# Altium PCB sensors_8.PcbDoc
Units mil, origin at the board's own origin, x right, y up, seen from the top; angles counter-clockwise.
Board outline 3225 x 690 mil, 2 copper layers (Top Layer, Bottom Layer); 33 components, 26 nets, 92 pads, 0 vias.
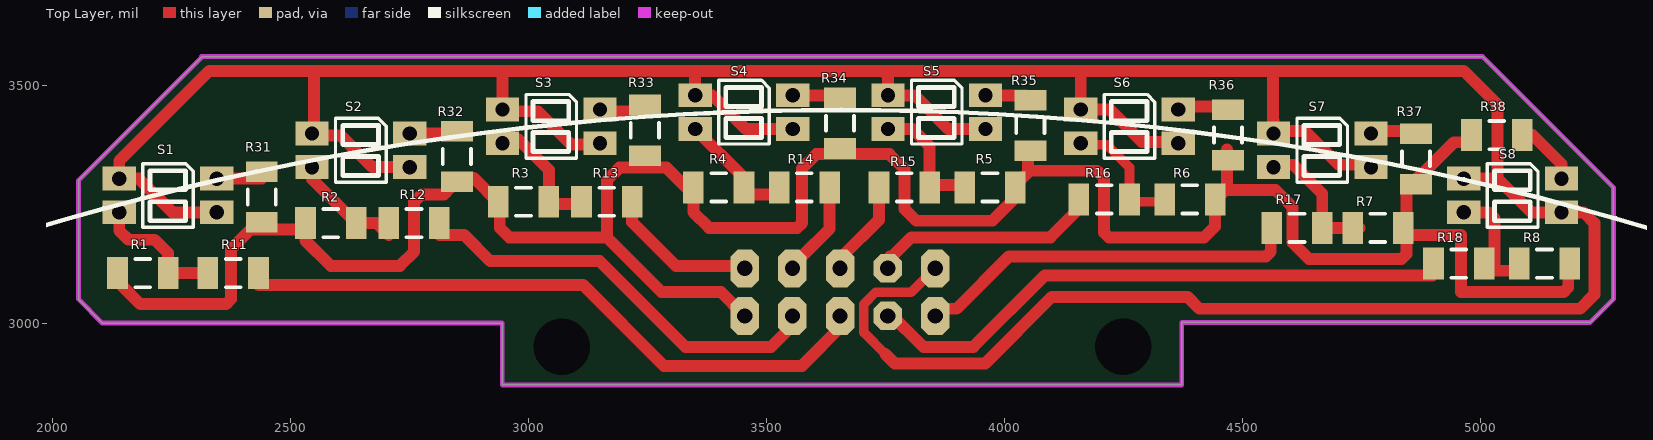
[diagram p0: Top Layer view]
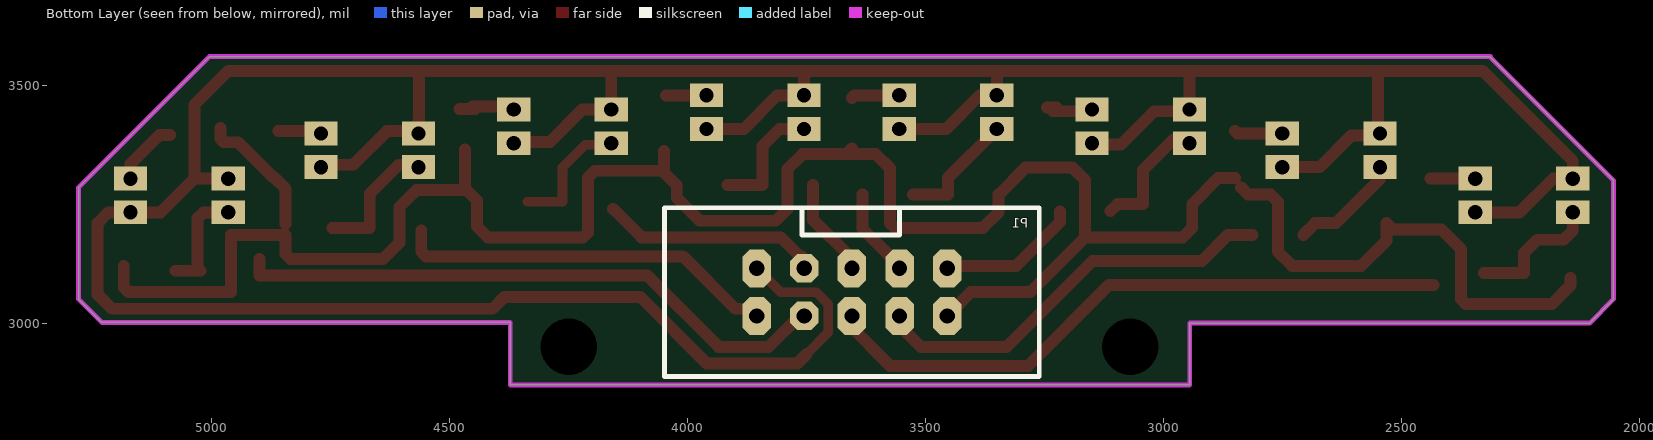
[diagram p1: Bottom Layer view, seen from below]

## Layer stack, top to bottom
Top Solder: solder mask 0.4, Solder Resist, Dk 3.5
Top Layer: signal copper 1.4
Dielectric1: dielectric 12.6, FR-4, Dk 4.8
Bottom Layer: signal copper 1.4
Bottom Solder: solder mask 0.4, Solder Resist, Dk 3.5

## Board outline
2055,3300 2313.75,3558.75 2315,3560 5005,3560 5275,3290 5280,3285 5280,3050 5231.25,3001.25 5230,3001.25 4372.8,3001.25 4372.8,2870 2945,2870 2945,3000 2105,3000 2055,3050 2055,3300

## Design rules (kind name [scope] priority, off if disabled: settings)
Clearance [All] p1: gap=10 ignorepadtopadclearanceinfootprint=FALSE except(0: Arc-Hole Track-Hole SMDPad-Hole THPad-Hole Via-Hole Fill-Hole Poly-Hole Region-Hole Text-Hole)
PolygonConnect [All] p1: connectstyle=Relief reliefconductorwidth=10 reliefentries=4 polygonreliefangle="90 Angle" airgapwidth=10
RoutingVias [All] p1: holewidth=28 width=50 viastyle="Through Hole" minholewidth=28 minwidth=50 maxholewidth=28 maxwidth=50
SolderMaskExpansion [All] p1: expansion=4 istentingtop=FALSE
Width [All] p1: maxlimit=30 minlimit=20 preferedwidth=25 bottomlayer_minwidth=25 minimp=50.000000 maximp=50.000000 favimp=50.000000
30 further rules are at their usual default settings.

## Components (designator, comment, footprint, x,y, rotation, side; value= is the part's Value field where it differs from the comment)
P1 "Header 5X2" "HDR-5x2 CON 2" 3655,3065 r0 bottom
R1 "Res1" C1206 2190,3105 r180 top
R2 "Res1" C1206 2585,3210 r180 top
R3 "Res1" C1206 2990,3255 r180 top
R4 "Res1" C1206 3400,3285 r180 top
R5 "Res1" C1206 3970,3285 r0 top
R6 "Res1" C1206 4390,3260 r0 top (schematic designator R16)
R7 "Res1" C1206 4785,3200 r0 top (schematic designator R17)
R8 "Res1" C1206 5135,3125 r0 top (schematic designator R18)
R11 "Res1" C1206 2380,3105 r180 top
R12 "Res1" C1206 2760,3210 r180 top
R13 "Res1" C1206 3165,3255 r180 top
R14 "Res1" C1206 3580,3285 r180 top
R15 "Res1" C1206 3790,3285 r0 top
R16 "Res1" C1206 4210,3260 r0 top (schematic designator R22)
R17 "Res1" C1206 4615,3200 r0 top (schematic designator R23)
R18 "Res1" C1206 4955,3125 r0 top (schematic designator R24)
R31 "Res1" C1206 2440,3265 r270 top (schematic designator R6)
R32 "Res1" C1206 2850,3350 r270 top (schematic designator R7)
R33 "Res1" C1206 3245,3405 r270 top (schematic designator R8)
R34 "Res1" C1206 3655,3420 r270 top (schematic designator R9)
R35 "Res1" C1206 4055,3415 r270 top (schematic designator R10)
R36 "Res1" C1206 4470,3395 r270 top (schematic designator R19)
R37 "Res1" C1206 4865,3345 r270 top (schematic designator R20)
R38 "Res1" C1206 5035,3395 r180 top (schematic designator R21)
S1 "ITR8307_1" "ITR8307 - TH" 2190,3335 r180 top
S2 "ITR8307_1" "ITR8307 - TH" 2595,3430 r180 top
S3 "ITR8307_1" "ITR8307 - TH" 2995,3480.32 r180 top
S4 "ITR8307_1" "ITR8307 - TH" 3400,3510 r180 top
S5 "ITR8307_1" "ITR8307 - TH" 3805,3510 r180 top
S6 "ITR8307_1" "ITR8307 - TH" 4210,3480.32 r180 top
S7 "ITR8307_1" "ITR8307 - TH" 4615,3430 r180 top
S8 "ITR8307_1" "ITR8307 - TH" 5015,3335 r180 top

## Footprints (in the part's own frame and the unit in brackets; to place one, negate y for a bottom-side part, rotate by r counter-clockwise, add the part's x,y. Pads: shape width x height; smd on the part's side, far side on the other; paste and mask are expansions set on the pad)
C1206 [mm] "Chip Capacitor, Body 3.2x1.6mm, IPC High Density"
  rect 1.1x1.7 smd: 1(-1.35,0) 2(1.35,0)
  silkscreen extent -0.4,-0.75 0.4,0.75, body extent -1.7,-0.9 1.7,0.9, height 1.3
"HDR-5x2 CON 2" [mil]
  oct 60x80 hole 32: 1(-200,50) 2(-200,-50) 3(-100,50) 4(-100,-50) 5(0,50) 6(0,-50) 9(200,50) 10(200,-50)
  oct 60x60 hole 32: 7(100,50) 8(100,-50)
  silkscreen extent -394,-177 394,177, body extent -400,-174 400,180, height 360
"ITR8307 - TH" [mil]
  rect 70x50 hole 30: 1(-155.67,102.36) 2(-155.67,31.5) 3(49.37,31.5) 4(49.37,102.36)
  silkscreen extent -106,0 0,134, body extent -139,-5 39,137, height 60

## Part data
P1: "Header, 5-Pin, Dual row"
R1 R2 R3 R4 R5 R6 R7 R8 R11 R12 R13 R14 R15 R16 R17 R18 R31 R32 R33 R34 R35 R36 R37 R38: "Resistor"

## Free pads (board coordinates)
  round 60 hole 118.11: 0(3070.32,2950.32) 0(4250,2950.32)

## Nets (pads, with @x,y where several pads share a name; then routed paths per layer and width w, separated by ;. In a path a pad name is that pad's centre, name@x,y a point inside that pad or via, vN(x,y) a via of type N, cw(c..) or ccw(c..) an arc to the next point about the centre after c; other vN are vias at no path point)
GND: P1.10 S1.1 S1.3 S2.1 S2.3 S3.1 S3.3 S4.1 S4.3 S5.1 S5.3 S6.1 S6.3 S7.1 S7.3 S8.1 S8.3 | length 7782.8
  Top Layer w20: 3750,2935 3705,2980 3705,3040 3730,3065 3805,3065 P1.10@3860,3120
  Top Layer w25: S1.1 2252.36,3232.64 2181.5,3303.5 S1.3 2140.63,3340.63 2330,3530 2945.63,3530 ; 2550,3530 2550,3394.13 2605.87,3394.13 2672.36,3327.64 S2.1 ; S3.3@2945.63,3445 3020,3445 3090,3375 3128.31,3375 3125.35,3377.95 S3.1 ; S3.3 2945.63,3530 ; S4.1 3457.36,3407.64 3386.5,3478.5 S4.3 3350.63,3524.68 3345.32,3530 ; 3750,2935 3770,2915 3960,2915 4100,3055 4385,3055 4410,3030 5210,3030 5240,3060 5240,3210 5217.36,3232.64 S8.1 5107.36,3232.64 5036.5,3303.5 ; S5.3@3755.63,3499.37 S5.3 ; S5.1@3980,3407.64 S5.1 3882.36,3407.64 3811.5,3478.5 S5.3 ; 4162.5,3530 4160.63,3528.13 S6.3 4221.18,3448.82 4289.69,3380.32 4342.99,3380.32 4338.31,3385 S6.1@4370,3385 ; 4565,3530 4565,3425 4565.63,3425.63 4565.63,3403.5 4631.5,3403.5 4702.36,3332.64 S7.1@4770.67,3332.64 ; S8.3 5036.5,3303.5 ; 2945.63,3530 3345.32,3530 ; 3345.32,3530 3745,3530 ; 3745,3530 4965,3530 5036.5,3458.5 5036.5,3303.5 ; 3745,3530 3755.63,3519.37 S5.3
NetR1_1: R1.1 R11.2 S1.4 | length 286
  Top Layer w25: S1.4 2140.63,3194.37 2160,3175 2215,3175 2243.15,3146.85 R1.1 R11.2
NetR2_1: R2.1 R12.2 S2.4 | length 235
  Top Layer w25: S2.4 2545.63,3302.52 R2.1 2681.85,3210 R12.2@2706.85,3185
NetR3_1: R3.1 R13.2 S3.4 | length 278.1
  Top Layer w25: S3.4@2945,3370 2962.99,3370 2979,3386 3043.15,3321.85 3043.15,3250 3096.85,3250 R13.2@3111.85,3235
NetR4_1: R4.1 R14.2 S4.4 | length 253.8
  Top Layer w25: S4.4 3453.15,3305.12 3453.15,3270 R14.2@3526.85,3270
NetR5_1: R5.1 R15.2 S5.4 | length 257.9
  Top Layer w25: S5.4 3807.36,3407.64 3843.15,3371.85 3843.15,3290 R5.1@3916.85,3290
NetR6_1: R6.1 R16.2 S6.4 | length 268
  Top Layer w20: S6.4@4160.63,3375 4215,3375 4263.15,3326.85 4263.15,3255 R6.1@4336.85,3255
NetR7_1: R7.1 R17.2 S7.4 | length 278.2
  Top Layer w25: S7.4@4565.63,3332.64 4607.36,3332.64 4668.15,3271.85 R17.2 R7.1@4746.85,3200
NetR8_1: R8.1 R18.2 S8.4 | length 233.3
  Top Layer w25: S8.4 5017.36,3232.64 5030,3220 5030,3110 ; R18.2@5023.15,3110 R8.1@5076.85,3110
NetR31_1: R31.1 S1.2 | length 94.5
  Top Layer w25: S1.2 2439.65,3303.5 R31.1@2440,3303.15
NetR32_1: R32.1 S2.2 | length 101.3
  Top Layer w25: S2.2 2845.35,3398.5 R32.1
NetR33_1: R33.1 S3.2 | length 123.2
  Top Layer w25: S3.2 3175.98,3448.82 3172.16,3445 3233.15,3445 3225,3453.15 R33.1@3245,3453.15
NetR34_1: R34.1 S4.2 | length 101.5
  Top Layer w25: S4.2 3649.65,3478.5 R34.1
NetR35_1: R35.1 S5.2 | length 84.7
  Top Layer w25: S5.2 R35.1@4045.35,3478.5
NetR36_1: R36.1 S6.2 | length 129
  Top Layer w25: S6.2 4371.85,3455 4451.85,3455 4446.85,3450 R36.1@4480,3450
NetR37_1: R37.1 S7.2 | length 89.7
  Top Layer w25: S7.2@4770.67,3403.5 R37.1@4860.35,3403.5
NetR38_1: R38.1 S8.2 | length 138.5
  Top Layer w25: R38.1 5110,3395 5170.67,3334.33 S8.2
OUT1: P1.5 R11.1 | length 1357.5
  Top Layer w25: R11.1@2433.15,3080 3115,3080 3285,2910 3575,2910 3660,2995 P1.5@3660,3020
OUT2: P1.3 R12.1 | length 884.9
  Top Layer w25: R12.1@2813.15,3185 2865,3185 2920,3130 3150,3130 3330,2950 3510,2950 3560,3000 P1.3@3560,3020
OUT3: P1.2 R13.1 | length 303
  Top Layer w25: R13.1@3218.15,3235 3218.15,3211.85 3310,3120 P1.2@3460,3120
OUT4: P1.4 R14.1 | length 169.1
  Top Layer w25: P1.4@3560,3140 3575,3140 3633.15,3198.15 R14.1@3633.15,3270
OUT5: P1.6 R15.1 | length 181.8
  Top Layer w25: P1.6@3660,3140 3736.85,3216.85 R15.1@3736.85,3290
OUT6: P1.8 R16.1 | length 438.3
  Top Layer w25: P1.8@3760,3140 3765,3140 3805,3180 4096.85,3180 R16.1@4156.85,3240
OUT7: P1.9 R17.1 | length 798.8
  Top Layer w25: P1.9@3860,3040 3870,3030 3900,3030 4010,3140 4550,3140 4560,3150 R17.1@4560,3195
OUT8: P1.7 R18.1 | length 1266.1
  Top Layer w25: P1.7@3760,3020 3830,2950 3935,2950 4085,3100 4900,3100 R18.1@4900,3135
VCC: P1.1 R1.2 R2.2 R3.2 R4.2 R5.2 R6.2 R7.2 R8.2 R31.2 R32.2 R33.2 R34.2 R35.2 R36.2 R37.2 R38.2 | length 5291.6
  Top Layer w25: R1.2@2145,3095 2145,3080 2185,3040 2365,3040 2375,3050 2375,3155 2416.85,3196.85 2518.7,3196.85 R2.2 2531.85,3173.15 2585,3120 2730,3120 2760,3150 2760,3255 2775,3270 2822.5,3270 R32.2@2837.5,3285 ; R32.2@2850,3305 2885,3305 2940,3250 2940,3200 2960,3180 3165,3180 ; P1.1@3450,3020 3405,3065 3280,3065 3165,3180 ; R34.2 R34.2@3666.85,3355 ; R35.2@4050,3361.85 4050,3316.85 R5.2@4023.15,3290 ; 4468.15,3280 4569.79,3280 4606,3243.79 4606,3169 4640,3135 4835,3135 4845,3145 4845,3185.14 4959.86,3185.14 4960,3185 4960,3065 5175,3065 5185,3075 R8.2@5185,3120 ; 4468.15,3365 4468.15,3283.15 4443.15,3258.15 4443.15,3203.15 4420,3180 4220,3180 4210,3190 4210,3305 4195,3320 4053.15,3320 R5.2@4023.15,3290 ; R7.2@4845,3208.15 4845,3281.85 4870,3306.85 4871.85,3306.85 4945,3380 4975,3380 4981.85,3386.85 R38.2@4981.85,3410 ; 3165,3180 3165,3300 3191.85,3326.85 3290,3326.85 3346.85,3270 3346.85,3233.15 3380,3200 3565,3200 3575,3210 3575,3325 3605,3355 R34.2@3666.85,3355 ; R34.2@3666.85,3355 3758.79,3355 3790,3323.79 3790,3240 3815,3215 3975,3215 4023.15,3263.15 R5.2@4023.15,3290

## Keep-outs
Keep-Out Layer:
  lines w10: 2312.8,3560 5005,3560 5280,3285 5280,3050 5230.62,3000.62 ; 2313.75,3558.75 2055,3300 2055,3050 2105,3000 2945,3000 2945,2870 4372.8,2870 4372.8,3001.25 5230,3001.25

## Silkscreen, mask and mechanical layers (free items; w line width, h text height)
Top Overlay:
  lines w10: 1791.7,3144.92 cw(c3658.97,-2457.61) 5522.09,3146.3
  text "R=15 (cm)" at 1440,3235 h60

## Dimensions
5230.62,3000.62 to 4372.8,2870 on Top Overlay
2945,2870 to 4372.8,2870 on Top Overlay
5280,3285 to 2055,3300 on Top Overlay
4250,2950.32 to 3070.32,2950.32 on Top Overlay
5005,3560 to 5230,3001.25 on Top Overlay
5005,3560 to 2313.75,3558.75 on Top Overlay